# Altium PCB PCB1.PcbDoc
Units mil, origin at the board's own origin, x right, y up, seen from the top; angles counter-clockwise.
Board outline 3260 x 700 mil, 2 copper layers (Top Layer, Bottom Layer); 48 components, 75 nets, 234 pads, 72 vias.
Unrouted connection lines stored in the file: 3.
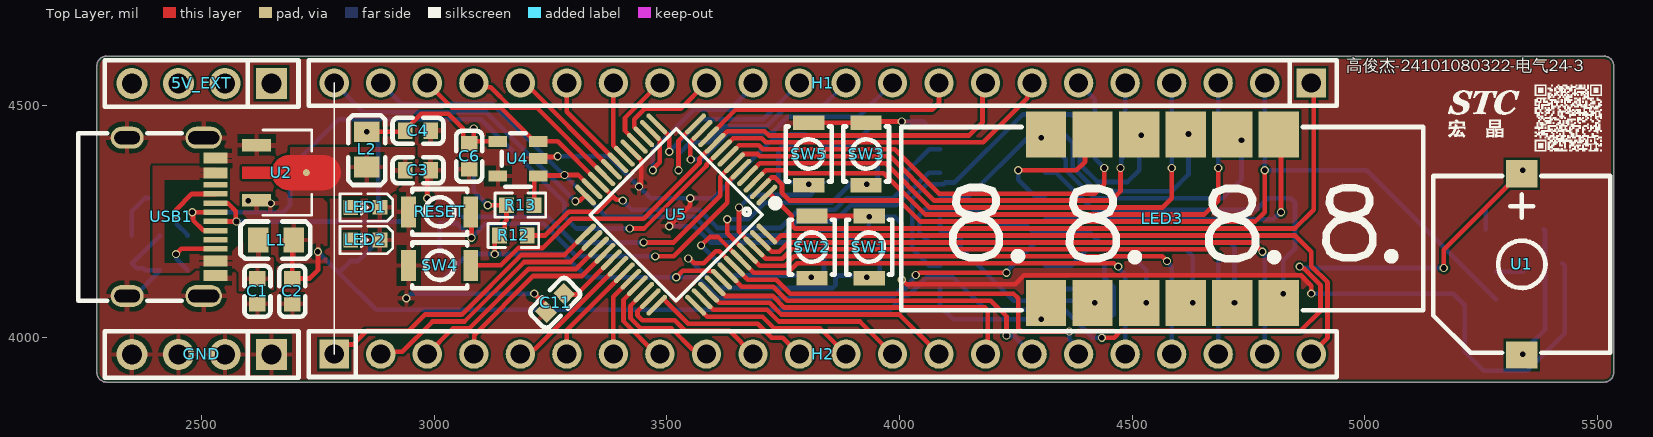
[diagram p0: Top Layer view]
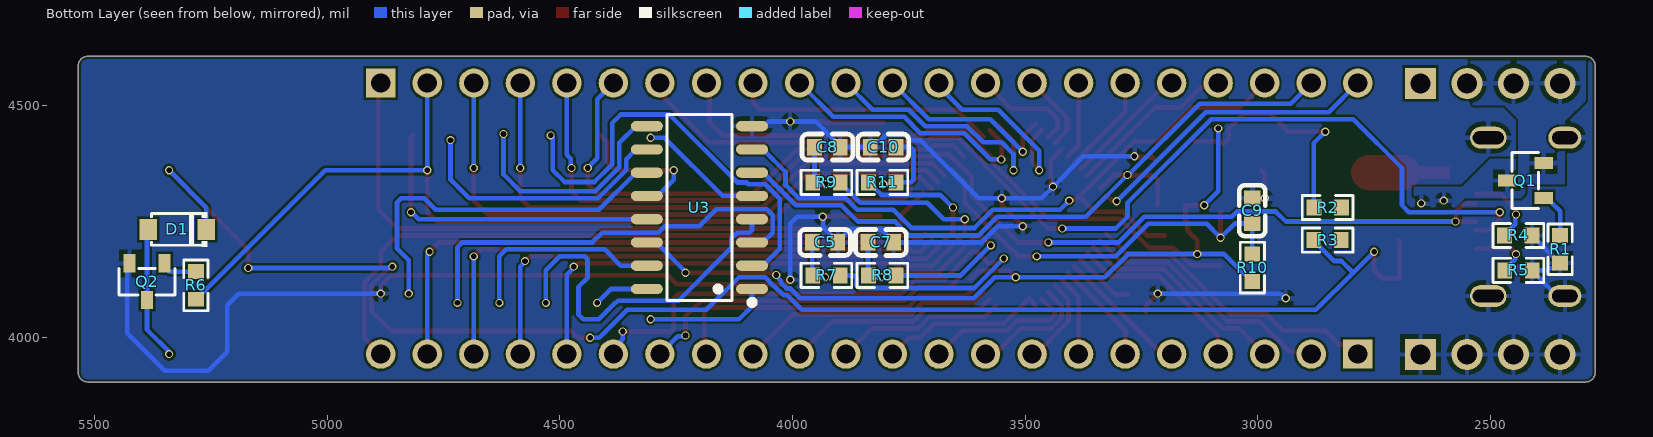
[diagram p1: Bottom Layer view, seen from below]

## Layer stack, top to bottom
Top Solder: solder mask 0.4, Solder Resist, Dk 3.5
Top Layer: signal copper 1.4
Dielectric 1: dielectric 12.6, FR-4, Dk 4.8
Bottom Layer: signal copper 1.4
Bottom Solder: solder mask 0.4, Solder Resist, Dk 3.5

## Board outline
2275,3925 2275,4585 cw(c2295,4585) 2295,4605 5515,4605 cw(c5515,4585) 5535,4585 5535,3925 cw(c5515,3925) 5515,3905 2295,3905 cw(c2295,3925)

## Design rules (kind name [scope] priority, off if disabled: settings)
Clearance [All] p1: gap=5 ignorepadtopadclearanceinfootprint=TRUE
ComponentClearance [All] p1: gap=10 collisioncheckmode=3 verticalgap=10 showdistances=FALSE donotcheckwithout3dbody=TRUE
PolygonConnect [All] p1: connectstyle=Relief reliefconductorwidth=10 reliefentries=4 polygonreliefangle="90 Angle" airgapwidth=10
RoutingVias [All] p1: holewidth=28 width=50 viastyle="Through Hole" minholewidth=28 minwidth=50 maxholewidth=28 maxwidth=50
SolderMaskExpansion [All] p1: expansion=4 istentingtop=FALSE
Width [All] p1: maxlimit=7452 minlimit=99999 preferedwidth=8 toplayer_minwidth=0 bottomlayer_minwidth=0 minimp=50.000000 maximp=50.000000 favimp=50.000000
29 further rules are at their usual default settings.

## Classes and differential pairs
component class Sheet2: C11 H1 H2 U5
component class Sheet1: 5V_EXT C1 C2 C3 C4 C5 C6 C7 C8 C9 C10 D1 GND L1 L2 LED1 LED2 LED3 Q1 Q2 R1 R2 R3 R4 R5 R6 R7 R8 R9 R10 R11 R12 R13 RESET SW1 SW2 SW3 SW4 SW5 U1 U2 U3 U4 USB1

## Components (designator, comment, footprint, x,y, rotation, side; value= is the part's Value field where it differs from the comment)
5V_EXT "" HDR-TH_4P-P2.54-V-F 2500,4546.89 r180 top
C1 "1uf/0603" C0603 2620,4100 r90 top
C2 "1uf/0603" C0603 2695,4100 r90 top
C3 "1uf/0603" C0603 2965,4360 r180 top
C4 "1uf/0603" C0603 2965,4445 r180 top
C5 "100nF/0603" C0603 3930,4205 r0 bottom
C6 "1uf/0603" C0603 3075,4390 r90 top
C7 "100nF/0603" C0603 3810,4205 r0 bottom
C8 "100nF/0603" C0603 3925,4410 r0 bottom
C9 "100nF/0603" C0603 3011.71,4273.19 r270 bottom
C10 "100nF/0603" C0603 3805,4410 r180 bottom
C11 "1uf/0603" C0603 3260,4075 r45 top
D1 "1N4148W-E" SOD-123_L2.8-W1.6-LS3.7-RD 5322.4,4232.93 r0 bottom
GND "" HDR-TH_4P-P2.54-V-F 2500,3964.21 r180 top
H1 "HC-PZ254-11.5L-1x22PZ" HDR-TH_22P-P2.54-V-M 3835,4547.68 r180 top
H2 "HC-PZ254-11.5L-1x22PZ" HDR-TH_22P-P2.54-V-M 3835,3965 r0 top
L1 "BLM21PG221SN1D" L0805 2660,4210 r0 top
L2 "BLM21PG221SN1D" L0805 2855,4405 r90 top
LED1 "" LED_0603 2850,4280 r180 top
LED2 "" LED_0603 2850,4210 r180 top
LED3 "XL-SA2401SRWC" LED-SEG-SMD_12P-L28.5-W10.0-P2.54 4565,4256.1 r0 top
Q1 "HL3401A" SOT-23-3_L2.9-W1.3-P1.90-LS2.4-BR 2424.93,4337.93 r180 bottom
Q2 "SS8050" SOT-23-3_L2.9-W1.3-P1.90-LS2.4-BR 5387.4,4120.63 r90 bottom
R1 "0603/5k1" R0603 2350,4190.34 r270 bottom
R2 "0603/5k1" R0603 2849.66,4280 r0 bottom
R3 "0603/5k1" R0603 2850,4210 r0 bottom
R4 "0603/5k1" R0603 2440,4220 r0 bottom
R5 "0603/5k1" R0603 2439.66,4145 r180 bottom
R6 "1K/0603" R0603 5282.4,4112.59 r90 bottom
R7 "0603/300R" R0603 3926.95,4134.08 r180 bottom
R8 "0603/300R" R0603 3806.95,4134.08 r180 bottom
R9 "0603/300R" R0603 3926.95,4334.08 r180 bottom
R10 "0603/5k1" R0603 3011.71,4150.75 r270 bottom
R11 "0603/300R" R0603 3806.95,4334.08 r0 bottom
R12 "0603/5k1" R0603 3170,4220 r0 top
R13 "0603/5k1" R0603 3185,4285 r0 top
RESET "B3U-1000P" KEY-SMD_B3U-1000PM 3011.71,4270.75 r180 top
SW1 "B3U-1000P" KEY-SMD_B3U-1000PM 3935,4195 r270 top
SW2 "B3U-1000P" KEY-SMD_B3U-1000PM 3811.67,4195 r270 top
SW3 "B3U-1000P" KEY-SMD_B3U-1000PM 3928.33,4395 r270 top
SW4 "P32->GND" KEY-SMD_B3U-1000PM 3011.71,4155.75 r180 top
SW5 "B3U-1000P" KEY-SMD_B3U-1000PM 3805,4395 r270 top
U1 "2.7kHz" BUZ-SMD_L9.7-W9.7 5337.4,4157.93 r0 top
U2 "HR1117V-3.3" SOT-89-3_L4.5-W2.4-P1.50-LS4.0-BR 2671.6,4354.99 r180 top
U3 "CH455G" SOP-16_L10.0-W3.9-P1.27-LS6.0-BL 4200,4280 r90 bottom
U4 "24C16S(XBLW)" SOT-23-5_L2.9-W1.6-P0.95-LS2.8-BL 3180,4385 r90 top
U5 "AI8051U-34K64-LQFP48" LQFP-48_L7.0-W7.0-P0.50-LS9.0-BL 3520,4265 r135 top
USB1 "" USB_TYPE-C-16P 2435,4265 r270 top

## Footprints (in the part's own frame and the unit in brackets; to place one, negate y for a bottom-side part, rotate by r counter-clockwise, add the part's x,y. Pads: shape width x height; smd on the part's side, far side on the other; paste and mask are expansions set on the pad)
BUZ-SMD_L9.7-W9.7 [mm]
  rect 1.7x1.5 smd paste+0.051: 1(0,4.95) 2(0,-4.95)
  silkscreen extent -4.83,-4.83 4.83,4.83
C0603 [mm]
  rect 0.8x0.9 smd paste+0.051: 1(-0.7,0) 2(0.7,0)
  silkscreen extent -1.39,-0.71 1.39,0.71
HDR-TH_4P-P2.54-V-F [mm]
  rect 1.7x1.7 hole 1.1 paste-2539.97: 1(-3.81,0)
  round 1.7 hole 1.1 paste-2539.97: 2(-1.27,0) 3(1.27,0) 4(3.81,0)
  silkscreen extent -5.29,-1.27 5.29,1.27
HDR-TH_22P-P2.54-V-M [mm]
  rect 1.6x1.6 hole 1.05 paste-2539.97: 1(-26.67,0)
  round 1.6 hole 1.05 paste-2539.97: 2(-24.13,0) 3(-21.59,0) 4(-19.05,0) 5(-16.51,0) 6(-13.97,0) 7(-11.43,0) 8(-8.89,0) 9(-6.35,0) 10(-3.81,0) 11(-1.27,0) 12(1.27,0) 13(3.81,0) 14(6.35,0) 15(8.89,0) 16(11.43,0) 17(13.97,0) 18(16.51,0) 19(19.05,0) 20(21.59,0) 21(24.13,0) 22(26.67,0)
  silkscreen extent -28.06,-1.25 28.06,1.25
KEY-SMD_B3U-1000PM [mm]
  rect 0.8x1.7 smd paste+0.051: 1(-1.7,0) 2(1.7,0)
  silkscreen extent -1.5,-1.25 1.5,1.25
L0805 [mil]
  rect 44.59x54.21 smd paste-3937.01 mask+2: 1(-38.04,0) 2(38.04,0)
  silkscreen extent -77,-40 73,40
LED-SEG-SMD_12P-L28.5-W10.0-P2.54 [mm]
  rect 2.2x2.5 smd paste+0 mask+0.05: 1(-6.35,-4.6) 2(-3.81,-4.6) 3(-1.27,-4.6) 4(1.27,-4.6) 5(3.81,-4.6) 6(6.35,-4.6) 7(6.35,4.6) 8(3.81,4.6) 9(1.27,4.6) 10(-1.27,4.6) 11(-3.81,4.6) 12(-6.35,4.6)
  silkscreen extent -14.25,-5 14.25,5
LED_0603 [mil]
  rect 31.5x31.5 smd paste+0 mask+2: 1(-33.5,-0.4) 2(29.5,-0.2)
  silkscreen extent -61,-30 53,30
LQFP-48_L7.0-W7.0-P0.50-LS9.0-BL [mm]
  oval 0.27x1.5 smd paste+0 mask+0.05: 1(-2.75,-4.25) 2(-2.25,-4.25) 3(-1.75,-4.25) 4(-1.25,-4.25) 5(-0.75,-4.25) 6(-0.25,-4.25) 7(0.25,-4.25) 8(0.75,-4.25) 9(1.25,-4.25) 10(1.75,-4.25) 11(2.25,-4.25) 12(2.75,-4.25) 25(2.75,4.25) 26(2.25,4.25) 27(1.75,4.25) 28(1.25,4.25) 29(0.75,4.25) 30(0.25,4.25) 31(-0.25,4.25) 32(-0.75,4.25) 33(-1.25,4.25) 34(-1.75,4.25) 35(-2.25,4.25) 36(-2.75,4.25)
  oval 1.5x0.27 smd paste+0 mask+0.05: 13(4.25,-2.75) 14(4.25,-2.25) 15(4.25,-1.75) 16(4.25,-1.25) 17(4.25,-0.75) 18(4.25,-0.25) 19(4.25,0.25) 20(4.25,0.75) 21(4.25,1.25) 22(4.25,1.75) 23(4.25,2.25) 24(4.25,2.75) 37(-4.25,2.75) 38(-4.25,2.25) 39(-4.25,1.75) 40(-4.25,1.25) 41(-4.25,0.75) 42(-4.25,0.25) 43(-4.25,-0.25) 44(-4.25,-0.75) 45(-4.25,-1.25) 46(-4.25,-1.75) 47(-4.25,-2.25) 48(-4.25,-2.75)
  silkscreen extent -3.59,-4.46 3.3,3.34
R0603 [mil]
  rect 31.75x34.02 smd paste-3937.01 mask+2: 1(-29.66,0) 2(29.66,0)
  silkscreen extent -55,-26 55,26
SOD-123_L2.8-W1.6-LS3.7-RD [mm]
  rect 0.95x1.15 smd paste+0.051: 1(-1.592,0) 2(1.592,0)
  silkscreen extent -1.63,-0.94 1.41,0.94
SOP-16_L10.0-W3.9-P1.27-LS6.0-BL [mm]
  oval 0.56x1.745 smd paste+0.051: 1(-4.445,-2.872) 2(-3.175,-2.872) 3(-1.905,-2.872) 4(-0.635,-2.872) 5(0.635,-2.872) 6(1.905,-2.872) 7(3.175,-2.872) 8(4.445,-2.872) 9(4.445,2.872) 10(3.175,2.872) 11(1.905,2.872) 12(0.635,2.872) 13(-0.635,2.872) 14(-1.905,2.872) 15(-3.175,2.872) 16(-4.445,2.872)
  silkscreen extent -5.33,-3.02 5.08,1.77
SOT-23-3_L2.9-W1.3-P1.90-LS2.4-BR [mm]
  rect 1x0.65 smd paste+0.051: 1(1,-0.95) 2(1,0.95) 3(-1,0)
  silkscreen extent -0.73,-1.53 0.73,1.53
SOT-23-5_L2.9-W1.6-P0.95-LS2.8-BL [mm]
  rect 0.6x1 smd paste+0 mask+0.05: 1(-0.95,-1.1) 2(0,-1.1) 3(0.95,-1.1) 4(0.95,1.1) 5(-0.95,1.1)
  silkscreen extent -1.52,-0.7 1.4,0.89
SOT-89-3_L4.5-W2.4-P1.50-LS4.0-BR [mm]
  rect 1.575x0.672 smd paste+0.051: 1(1.356,-1.5) 3(1.356,1.5)
  round 0.38 smd: 2(-1.356,0)
  Top Layer region: -2.283,0.95 -0.429,0.95 -0.384,0.949 -0.34,0.946 -0.296,0.941 -0.252,0.933 -0.208,0.924 -0.165,0.913 -0.123,0.899 -0.081,0.884 -0.04,0.867 0,0.847 0.04,0.826 0.078,0.804 0.115,0.779 0.151,0.753 0.185,0.725 0.219,0.695 0.251,0.664 0.281,0.631 0.31,0.597 0.337,0.562 0.362,0.525 0.386,0.488 0.408,0.449 0.428,0.409 0.447,0.33 2.144,0.33 2.144,-0.33 0.447,-0.33 0.428,-0.409 0.408,-0.449 0.386,-0.488 0.362,-0.525 0.337,-0.562 0.31,-0.597 0.281,-0.631 0.251,-0.664 0.219,-0.695 0.185,-0.725 0.151,-0.753 0.115,-0.779 0.078,-0.804 0.04,-0.826 0,-0.847 -0.04,-0.867 -0.081,-0.884 -0.123,-0.899 -0.165,-0.913 -0.208,-0.924 -0.252,-0.933 -0.296,-0.941 -0.34,-0.946 -0.384,-0.949 -0.429,-0.95 -2.283,-0.95 -2.328,-0.949 -2.372,-0.946 -2.416,-0.941 -2.46,-0.933 -2.504,-0.924 -2.547,-0.913 -2.589,-0.899 -2.631,-0.884 -2.672,-0.867 -2.712,-0.847 -2.752,-0.826 -2.79,-0.804 -2.827,-0.779 -2.863,-0.753 -2.898,-0.725 -2.931,-0.695 -2.963,-0.664 -2.993,-0.631 -3.022,-0.597 -3.049,-0.562 -3.075,-0.525 -3.098,-0.488 -3.12,-0.449 -3.14,-0.409 -3.159,-0.369 -3.175,-0.327 -3.189,-0.285 -3.202,-0.242 -3.212,-0.199 -3.22,-0.155 -3.227,-0.111 -3.231,-0.067 -3.233,-0.022 -3.233,0.022 -3.231,0.067 -3.227,0.111 -3.22,0.155 -3.212,0.199 -3.202,0.242 -3.189,0.285 -3.175,0.327 -3.159,0.369 -3.14,0.409 -3.12,0.449 -3.098,0.488 -3.075,0.525 -3.049,0.562 -3.022,0.597 -2.993,0.631 -2.963,0.664 -2.931,0.695 -2.898,0.725 -2.863,0.753 -2.827,0.779 -2.79,0.804 -2.752,0.826 -2.712,0.847 -2.672,0.867 -2.631,0.884 -2.589,0.899 -2.547,0.913 -2.504,0.924 -2.46,0.933 -2.416,0.941 -2.372,0.946 -2.328,0.949
  silkscreen extent -1.65,-2.33 1,2.33
USB_TYPE-C-16P [mm]
  oval 1.2x2 hole 0.7 slot 1.7 at 90 deg paste-2539.97 mask+0.051: 1(-4.193,1.765) 2(4.447,1.765)
  oval 1.2x1.8 hole 0.7 slot 1.4 at 90 deg paste-2539.97 mask+0.051: 3(-4.193,-2.415) 4(4.447,-2.415)
  rect 0.3x1.3 smd paste-100 mask+0.05: A1(-3.223,2.415) A4(-2.423,2.415) A5(-1.123,2.415) A6(-0.123,2.415) A7(0.377,2.415) A8(1.377,2.415) A9(2.677,2.415) A12(3.477,2.415) B1(3.177,2.415) B4(2.377,2.415) B5(1.877,2.415) B6(0.877,2.415) B7(-0.623,2.415) B8(-1.623,2.415) B9(-2.123,2.415) B12(-2.923,2.415)
  silkscreen extent -4.45,-5.08 4.7,0.57

## Part data
5V_EXT GND: library part HDR-F_2.54_1x4P, AddInBom=yes, ConvertToPcb=yes, Device=HDR-F_2.54_1x4P, FootprintName=HDR-TH_4P-P2.54-V-F, ModelId=d187812051054f85879fcaa51a310d8e聨0819f05c4eef4c71ace90d822a990e87, ModelName=HDR-TH_4P-P2.54-V-F, ModelTransform=419.6842,98.464,0,0,0,0,0,0,-118.11, Supplier Footprint=插件, SupplierPart=C2718488, Symbol=2.54-1*4P母
C1 C2 C3 C4 C5 C6 C7 C8 C9 C10 C11: library part CAP_0603, 3D Model=ac125912035d415993ca9572d50418b1聨0819f05c4eef4c71ace90d822a990e87, 3D Model Transform=62.992,31.496,0,0,0,0,0,0,0, AddInBom=yes, ConvertToPcb=yes, Device=CAP_0603, FootprintName=C0603, ModelName=C0603_L1.6-W0.8-H0.8, Supplier Footprint=0603, Symbol=Capacitance
D1: "二极管配置:-;正向压降(Vf):-;直流反向耐压(Vr):-;", Forward Voltage (Vf@If)=-, JLCPCB Part Class=扩展库, LCSC Part Name=开关二极管, Manufacturer=MDD(辰达半导体), 3D Model=73858e86c18848f5a81710cfe7352ee5, 3D Model Transform=145.669,70.3249,0,0,0,0,0,0,0, AddInBom=yes, ConvertToPcb=yes, Datasheet=https://atta.szlcsc.com/upload/public/pdf/source/20240830/DACFAB1CEFECD76C0C0B0085B83E27DC.pdf, Device=1N4148W-E, Diode Configuration=-, FootprintName=SOD-123_L2.8-W1.6-LS3.7-RD, Manufacturer Part=1N4148W-E, ModelName=SOD-123_L2.8-W1.6-LS3.7-RD, Reverse Voltage (Vr)=-, Supplier=LCSC, Supplier Footprint=SOD-123, Supplier Part=C41371420, Symbol=1n4148w-e
H1 H2: "插针结构:1x22P;间距:2.54mm;行距:-;圆针/方针:方针;安装方式:直插;排数:单排;总PIN位数:22P;额定电流:3A;额定电压:-;配合针长度:6mm;塑高:2.5mm;端接针长度:3mm;触头材质:黄铜;触头镀层:金;工作温度:-40℃~+105℃;颜色:黑色;", Color=黑色, Current Rating=3A, JLCPCB Part Class="Extended Part", LCSC Part Name="1x22P 间距:2.54mm 方针 直插", Manufacturer=HC(虹成电子), Operating Temperature=-40℃~+105℃, Voltage Rating (Max)=-, AddInBom=yes, Circluar Pins/Square Pins=方针, Contact Material=黄铜, Contact Plating=金, ConvertToPcb=yes, Datasheet=https://item.szlcsc.com/datasheet/HC-PZ254-11.5L-1x22PZ/43143790.html, Device=HC-PZ254-11.5L-1x22PZ, FootprintName=HDR-TH_22P-P2.54-V-M, Insulation Height=2.5mm, Length of End Connection Pin=3mm, Length of Mating Pin=6mm, ManufacturerPart=HC-PZ254-11.5L-1x22PZ, ModelId=875f4c094945453e8148e92095c9b8a7聨0819f05c4eef4c71ace90d822a990e87, ModelName=HDR-TH_22P-P2.54-M-LI-1X22P, ModelTransform=2199.99552,98.425,0,0,0,0,0,0,-118.11, Mounting Type=直插, Number of Pins=22P, Number of Rows=单排, Pin Structure=1x22P, Pitch=2.54mm, Row Spacing=-, Supplier=LCSC, Supplier Footprint=插件,P=2.54mm, SupplierPart=C41375941, Symbol=HC-PZ254-11.5L-1X22PZ
L1 L2: "阻抗@频率:220Ω@100MHz;误差:±25%;直流电阻(DCR):45mΩ;", Current Rating=2A, DC Resistance(DCR)=45mΩ, Impedance @ Frequency=220Ω@100MHz, JLCPCB Part Class="Extended Part", LCSC Part Name="单路 0805磁珠 阻抗220Ω@100MHz", Manufacturer=muRata(村田), Operating Temperature=-55℃~+125℃, Tolerance=±25%, AddInBom=yes, ConvertToPcb=yes, Datasheet=https://item.szlcsc.com/datasheet/BLM21PG221SN1D/87016.html, Device=BLM21PG221SN1D, FootprintName=L0805, ManufacturerPart=BLM21PG221SN1D, ModelId=37a81e68749a4138bd2dfa6897b24b85聨0819f05c4eef4c71ace90d822a990e87, ModelName=R0805_L2.0-W1.3-H0.6, ModelTransform=78.74,51.181,0,0,0,0,0,0.001,0, Number of Circuits=1, Supplier=LCSC, Supplier Footprint=0805, SupplierPart=C85840, Symbol=BLM21PG221SN1D
LED1 LED2: library part LED_0603-G, 3D Model=8b5fcaf0229049f8a37a9c352bb0ca0a聨0819f05c4eef4c71ace90d822a990e87, 3D Model Transform=63.1,31.6,23.7,0,0,0,0,0,0, Add into BOM=yes, Convert to PCB=yes, Device=LED_0603-G, FootprintName=LED_0603, ModelName=LED-0603_G, Supplier Footprint=0603, Symbol=LED_G_OLD
LED3: "数码管位数:4位;字符尺寸(英寸):0.2;LED极性:共阴;发光颜色:红色;耗散功率(Pd):36mW;", Forward Voltage Drop=1.8V, Illumination Color=红色, JLCPCB Part Class="Extended Part", LCSC Part Name=0.2英寸红色四位共阴数码管, Manufacturer=XINGLIGHT(成兴光), Operating Temperature=-30℃~+70℃, Pd - Power Dissipation=36mW, AddInBom=yes, ConvertToPcb=yes, Datasheet=https://item.szlcsc.com/datasheet/XL-SA2401SRWC/52210392.html, Device=XL-SA2401SRWC, Digit/Alpha Size(inch)=0.2, Display Type=7段, FootprintName=LED-SEG-SMD_12P-L28.5-W10.0-P2.54, Height=-, LED Polarity=共阴, Length=-, Light Intensity=100mcd, ManufacturerPart=XL-SA2401SRWC, ModelId=84030f14c7a848788791f3033a3ddaf3聨0819f05c4eef4c71ace90d822a990e87, ModelName=LED-SEG-SMD_12P-L28.5-W10.0-P2.54, ModelTransform=1122.045,393.7,0,0,0,0,0,0,0, Number of Characters=4位, Supplier=LCSC, Supplier Footprint=SMD, SupplierPart=C49652871, Symbol=XL-SA2401SRWC, Width=-
Q1: "数量:1个P沟道;漏源电压(Vdss):30V;连续漏极电流(Id):4.2A;导通电阻(RDS(on)):50mΩ@10V;耗散功率(Pd):350mW;阈值电压(Vgs(th)):900mV@250uA;", Current - Continuous Drain(Id)=4.2A, Drain to Source Voltage=30V, Gate Threshold Voltage (Vgs(th))=900mV@250uA, Input Capacitance(Ciss)=954pF, JLCPCB Part Class="Extended Part", LCSC Part Name="1个P沟道 耐压:30V 电流:4.2A", Manufacturer=R+O(宏嘉诚), Operating Temperature=-55℃~+150℃, Output Capacitance(Coss)=115pF, Pd - Power Dissipation=350mW, Reverse Transfer Capacitance (Crss@Vds)=77pF, AddInBom=yes, ConvertToPcb=yes, Datasheet=https://item.szlcsc.com/datasheet/HL3401A/8397171.html, Device=HL3401A, FootprintName=SOT-23-3_L2.9-W1.3-P1.90-LS2.4-BR, Gate Charge(Qg)=22nC@10V, ManufacturerPart=HL3401A, ModelId=c62791f0466c4ae2a892c056b845b0ca聨0819f05c4eef4c71ace90d822a990e87, ModelName=SOT-23-3P_L2.9-W1.3-H1.0-LS2.4-P0.95, ModelTransform=98.425,114.173,0,180,0,0,0.0005,-0.0005,0, Number=1个P沟道, RDS(on)=50mΩ@10V, Supplier=LCSC, Supplier Footprint=SOT-23, SupplierPart=C7420349, Symbol=HL3401A, Type=P沟道
Q2: library part SS8050_C2150, "晶体管类型:NPN;集电极电流(Ic):1.5A;集射极击穿电压(Vceo):25V;功率(Pd):300mW;直流电流增益(hFE@Ic,Vce):200@100mA,1V;", Collector Current (Ic)=1.5A, Collector Cut-Off Current (Icbo)=100nA, Collector-Emitter Breakdown Voltage (Vceo)=25V, Collector-Emitter Saturation Voltage (VCE(sat)@Ic,Ib)=500mV@800mA,80mA, DC Current Gain (hFE@Ic,Vce)=200@100mA,1V, LCSC Part Name="SS8050(RANGE:200-350) hfe=200~350", Manufacturer=CJ(江苏长电/长晶), Operating Temperature=-, Power Dissipation (Pd)=300mW, Transition Frequency (fT)=100MHz, 3D Model=c62791f0466c4ae2a892c056b845b0ca, 3D Model Transform=98.425,114.173,0,180,0,0,0.0005,-0.0005,0, AddInBom=yes, ConvertToPcb=yes, Datasheet=https://atta.szlcsc.com/upload/public/pdf/source/20230322/AEE86F4B043774EFF80CAEA14A37D9E9.pdf, Device=SS8050_C2150, FootprintName=SOT-23-3_L2.9-W1.3-P1.90-LS2.4-BR, Manufacturer Part=SS8050, ModelName=SOT-23-3P_L2.9-W1.3-H1.0-LS2.4-P0.95, Supplier=LCSC, Supplier Footprint=SOT-23, Supplier Part=C2150, Symbol=SS8050_C2150, Transistor Type=NPN
R1 R2 R3 R4 R5 R6 R7 R8 R9 R10 R11 R12 R13: library part Res_0603, AddInBom=yes, ConvertToPcb=yes, Device=Res_0603, FootprintName=R0603, ModelId=fc143cca1e79419f9cd78b61e9279f08聨0819f05c4eef4c71ace90d822a990e87, ModelName=R0603, ModelTransform=31.8897,63.7794,0,90,0,0,0,0,0, Supplier Footprint=0603, Symbol=电阻
RESET SW1 SW2 SW3 SW5: "电路结构:单刀单掷;按钮形状:圆形按钮;作用力:1.53N;安装方式:立贴;开关长度:3mm;开关宽度:2.5mm;开关高度:1.6mm;触点电流:50mA;额定电压:12V;带灯:-;工作寿命:-;", Contact Current=50mA, JLCPCB Part Class="Extended Part", LCSC Part Name="3*2.5*1.6mm 立贴 轻触开关", Manufacturer=OMRON(欧姆龙), Operating Force=1.53N, Operating Temperature=-25℃~+70℃, Voltage Rating=12V, Actuator Style=圆形按钮, AddInBom=yes, Circuit=单刀单掷, ConvertToPcb=yes, Datasheet=https://item.szlcsc.com/datasheet/B3U-1000P/231216.html, Device=B3U-1000P, FootprintName=KEY-SMD_B3U-1000PM, Length=3mm, Life=-, ManufacturerPart=B3U-1000P, ModelId=4a122f942e8c428cab657e97b0b9ae70聨0819f05c4eef4c71ace90d822a990e87, ModelName=KEY-SMD_2P-L3.0-W2.5-H1.6-LS4.0, ModelTransform=157.48,98.425,0,0,0,0,0,0,0, Mounting Type=立贴, Supplier=LCSC, Supplier Footprint=SMD,2.5x3mm, SupplierPart=C231329, Switch Height=1.6mm, Symbol=B3U-1000P, Termination Style=SMD接片, Width=2.5mm, With Lamp=-
SW4: library part B3U-1000P, "电路结构:单刀单掷;按钮形状:圆形按钮;作用力:1.53N;安装方式:立贴;开关长度:3mm;开关宽度:2.5mm;开关高度:1.6mm;触点电流:50mA;额定电压:12V;带灯:-;工作寿命:-;", Contact Current=50mA, JLCPCB Part Class="Extended Part", LCSC Part Name="3*2.5*1.6mm 立贴 轻触开关", Manufacturer=OMRON(欧姆龙), Operating Force=1.53N, Operating Temperature=-25℃~+70℃, Voltage Rating=12V, Actuator Style=圆形按钮, AddInBom=yes, Circuit=单刀单掷, ConvertToPcb=yes, Datasheet=https://item.szlcsc.com/datasheet/B3U-1000P/231216.html, Device=B3U-1000P, FootprintName=KEY-SMD_B3U-1000PM, Length=3mm, Life=-, ManufacturerPart=B3U-1000P, ModelId=4a122f942e8c428cab657e97b0b9ae70聨0819f05c4eef4c71ace90d822a990e87, ModelName=KEY-SMD_2P-L3.0-W2.5-H1.6-LS4.0, ModelTransform=157.48,98.425,0,0,0,0,0,0,0, Mounting Type=立贴, Supplier=LCSC, Supplier Footprint=SMD,2.5x3mm, SupplierPart=C231329, Switch Height=1.6mm, Symbol=B3U-1000P, Termination Style=SMD接片, Width=2.5mm, With Lamp=-
U1: library part CMI-9705-0580-SMT-TR, "驱动方式:有源(内含驱动线路);构造类型:电磁式;额定电压:5V;频率:2.7kHz;声压(SPL):80dB;", Continuous Operating Time=-, Current Consumption=30mA, JLCPCB Part Class="Extended Part", LCSC Part Name=磁性蜂鸣器指示器，表面贴装，内部驱动, Manufacturer=CUI, Voltage - Supply=3V~8V, Voltage Rating=5V, AddInBom=yes, ConvertToPcb=yes, Datasheet=https://item.szlcsc.com/datasheet/CMI-9705-0580-SMT-TR/23802189.html, Device=CMI-9705-0580-SMT-TR, Diameter(φD)=-, Driver Circuitry=有源(内含驱动线路), FootprintName=BUZ-SMD_L9.7-W9.7, Height=-, Lead Pitch=-, Length=-, ManufacturerPart=CMI-9705-0580-SMT-TR, ModelId=4d30b5b9f6214c52b026a489d6e841ad聨0819f05c4eef4c71ace90d822a990e87, ModelName=BUZ-SMD_L9.7-W9.7, ModelTransform=382.283,397.637,0,0,0,0,0,-0.001,0, Mounting Type=-, Operating Temperature=-, Sound Pressure Level(SPL)=80dB, Supplier=LCSC, Supplier Footprint=SMD,9.7x9.7mm, SupplierPart=C22359716, Symbol=CMI-9705-0580-SMT-TR, Technology=电磁式, Width=-
U2: "输出极性:正极;工作电压:15V;输出电压:3.3V;输出电流:1A;电源纹波抑制比(PSRR):-;输出类型:固定;", JLCPCB Part Class="Extended Part", LCSC Part Name=低压差线性稳压器，分固定电压输出和可调电压输出版本, Manufacturer=R+O(宏嘉诚), Operating Temperature=-40℃~+85℃, Output Current=1A, Output Voltage=3.3V, Power Supply Rejection Ratio (PSRR)=-, standby current=2mA, Voltage - Supply=15V, Voltage Dropout=1.1V@(1A), AddInBom=yes, ConvertToPcb=yes, Datasheet=https://item.szlcsc.com/datasheet/HR1117V-3.3/57930308.html, Device=HR1117V-3.3, Features=热关断, FootprintName=SOT-89-3_L4.5-W2.4-P1.50-LS4.0-BR, ManufacturerPart=HR1117V-3.3, ModelId=dde435042bae4b9691e74da94cf9d9f3聨0819f05c4eef4c71ace90d822a990e87, ModelName=SOT-89-3_L4.5-W2.4-P1.50-LS4.0-BR, ModelTransform=177.165,161.417,0,90,0,0,-2.323,0,0, Noise=0.003%Vout, Number of Outputs=1, Output Configuration=正极, Output Type=固定, Supplier=LCSC, Supplier Footprint=SOT-89, SupplierPart=C54560864, Symbol=HR1117V-3.3
U3: "接口类型:I2C;工作电压:2.7V~5V;时钟频率(fc):4MHz;位驱动电流:160mA;段驱动电流:25mA;", Clock Frequency=4MHz, Digit Drive Current=160mA, JLCPCB Part Class="Extended Part", LCSC Part Name=数码管驱动及键盘控制芯片, Manufacturer=WCH(南京沁恒), Operating Temperature=-40℃~+85℃, Pd - Power Dissipation=-, Quiescent Current=50uA, Segment Drive Current=25mA, Voltage - Supply=2.7V~5V, AddInBom=yes, Configuration=7段x4位；8段x4位, ConvertToPcb=yes, Datasheet=https://item.szlcsc.com/datasheet/CH455G/91000.html, Device=CH455G, Features=键盘扫描；共阴极；辉光可调, FootprintName=SOP-16_L10.0-W3.9-P1.27-LS6.0-BL, Interface=I2C, ManufacturerPart=CH455G, ModelId=3361a6792abf4a8f8fbca4f1924a67ee聨0819f05c4eef4c71ace90d822a990e87, ModelName=SOP-16_L9.9-W3.9-H1.5-LS6.0-P1.27, ModelTransform=240.39054,393.7,0,90,0,0,0,0,0, Supplier=LCSC, Supplier Footprint=SOP-16, SupplierPart=C89818, Symbol=CH455G
U4: "接口类型:I2C;存储容量:16Kbit;时钟频率(fc):1MHz;", Clock Frequency=1MHz, JLCPCB Part Class="Extended Part", LCSC Part Name="16Kbit 串行EEPROM", Manufacturer=XBLW(芯伯乐), Operating Temperature=-40℃~+85℃, Voltage - Supply=1.8V~5.5V, AddInBom=yes, ConvertToPcb=yes, Data Retention - TDR (Year)=100年, Datasheet=https://item.szlcsc.com/datasheet/24C16S(XBLW)/43210132.html, Device=24C16S(XBLW), Features=内置上电复位(POR)；硬件写保护功能；噪声抑制功能, FootprintName=SOT-23-5_L2.9-W1.6-P0.95-LS2.8-BL, Interface=I2C, ManufacturerPart=24C16S(XBLW), Memory Size=16Kbit, ModelId=018c57e721114987ae90467fe9f1d259聨0819f05c4eef4c71ace90d822a990e87, ModelName=SOT-23-5_L2.9-W1.6-P0.95-LS2.8-BL, ModelTransform=114.96,110.236,0,0,0,0,0,0,0, Supplier=LCSC, Supplier Footprint=SOT-23-5, SupplierPart=C41408503, Symbol=24C16S(XBLW), Write Cycle Endurance=100万次, Write Cycle Time(Tw)=5ms
U5: "硬件浮点/硬件三角函数 跑100MHz, 32位8051-CPU 跑 44MHz，PWM 有硬件移相功能，DMA支持外设到外设，DMA支持PWM", JLCPCB Part Class="Extended Part", LCSC Part Name=单片机(MCU/MPU/SOC), Manufacturer=STC, AddInBom=yes, ConvertToPcb=yes, Datasheet=https://item.szlcsc.com/datasheet/AI8051U-34K64-LQFP48/44315053.html, Device=AI8051U-34K64-LQFP48, FootprintName=LQFP-48_L7.0-W7.0-P0.50-LS9.0-BL, ManufacturerPart=AI8051U-34K64-LQFP48, ModelId=093be70396ff421eb2cdb946d5311efc聨0819f05c4eef4c71ace90d822a990e87, ModelName=LQFP-48_L7.0-W7.0-H1.4-LS9.0-P0.50, ModelTransform=354.331,354.331,0,0,0,0,0,0,0, Supplier=LCSC, Supplier Footprint=LQFP-48(7x7), SupplierPart=C42388168, Symbol=AI8051U-34K64-LQFP48
USB1: library part USB_TYPE-C-16P, AddInBom=yes, ConvertToPcb=yes, Device=USB_TYPE-C-16P, FootprintName=USB_TYPE-C-16P, ModelId=35058e297fd54ee2afd2de30c3ce7155聨0819f05c4eef4c71ace90d822a990e87, ModelName=USB-C_SMD-TYPE-C-31-M-12, ModelTransform=360,318.121,0,180,0,0,0,-41.02,-39.37, Supplier Footprint=SMD, Symbol=USB_TYPE-C-16P

## Via types
v1: diameter 17.72, hole 12.01, Top Layer to Bottom Layer, 72 vias

## Nets (pads, with @x,y where several pads share a name; then routed paths per layer and width w, separated by ;. In a path a pad name is that pad's centre, name@x,y a point inside that pad or via, vN(x,y) a via of type N, cw(c..) or ccw(c..) an arc to the next point about the centre after c; other vN are vias at no path point)
+3V3: C3.2 L2.1 U2.2
+5V: C2.2 D1.1 L1.2 Q1.3 R3.2 U1.1 U2.3 | length 3487.2
  Top Layer w10: L1.2 2695,4206.96 C2.2 2732.56,4127.56 2750,4145 v1(2750,4185) v1@2750,4190 ; v1(4435,4000) 4461.32,4000 4475.89,4014.58 4861.24,4014.58 4905,4058.34 4905,4112.88 4868.66,4149.22 4865.95,4149.22 4862.09,4153.07 v1(4860,4153.07) ; v1(5170,4150) 5170,4189.35 5340,4359.35 v1(5340,4360)
  Bottom Layer w10: v1(2750,4185) 2795,4140 ; R3.2 2879.66,4208.87 2835.79,4165 2820,4165 2795,4140 ; v1(4435,4000) 4415,4000 4355,4060 4185,4060 4115,4130 4058.85,4130 4039.83,4110.98 4038.86,4110.98 4019.02,4091.14 4011.14,4091.14 3980,4060 2875,4060 2795,4140 ; v1(4860,4153.07) 4862.09,4153.07 4865.16,4150 v1(5170,4150) ; D1.1 5259.71,4279.71 v1(5340,4360)
  other v1: 2648.33,4288.86 2600,4295
+5V_EXT: 5V_EXT.1 5V_EXT.2 5V_EXT.3 5V_EXT.4 Q1.2
D+: H1.7 U5.8 USB1.A6 USB1.B6 | length 2326.7
  Top Layer w10: v1(2480,4270) v1@2480.08,4269.92 ; USB1.B6 2529.17,4231.38 2503.23,4231.38 2481.48,4253.13 2481.48,4268.52 v1@2480.08,4269.92 ; USB1.A6 2530,4269.92 v1@2480.08,4269.92 ; v1(3420,4235) 3450.77,4235 3585.04,4369.27 3585.04,4371.8 U5.8 3617.6,4404.19 3642.23,4428.82 3703.61,4428.82 3712.43,4420 4180,4420 4274.86,4514.86 4274.86,4537.54 H1.7
  Bottom Layer w10: v1(2480,4270) 2675,4270 2690,4285 2690,4365 2795,4470 3100,4470 3280,4290 3280,4260 3305,4235 v1(3420,4235)
D-: H1.5 U5.6 USB1.A7 USB1.B7 | length 2443.7
  Top Layer w10: USB1.A7 2530.16,4250.08 v1@2574.92,4250.08 ; USB1.B7 2530.99,4288.62 2556.93,4288.62 2573.52,4272.03 2573.52,4251.48 v1@2574.92,4250.08 ; v1(2575,4250) v1@2574.92,4250.08 ; v1(3450,4205) 3515,4205 3615,4305 3615,4346.09 U5.6 ; U5.6@3645.44,4376.36 3664.09,4395 3695,4395 3700,4390 3980,4390 4075,4295 4455,4295 4475,4315 v1(4475,4365)
  Bottom Layer w10: v1(2575,4250) 2940,4250 2961.37,4271.37 3044.84,4271.37 3056.21,4260 3243.79,4260 3298.79,4205 v1(3450,4205) ; v1(4475,4365) 4476.48,4366.48 4476.48,4385.34 4485,4393.86 H1.5
DIG1: LED3.12 U3.5 | length 269.9
  Bottom Layer w10: U3.5 4150.4,4305 4275.4,4430 v1(4305,4430)
DIG2: LED3.9 U3.9 | length 498.4
  Bottom Layer w10: U3.9 4336.42,4455 4372.44,4418.98 4372.44,4366.86 4424.3,4315 4585,4315 4621.09,4351.09 v1(4621.09,4438.02)
DIG3: LED3.8 U3.10 | length 580.6
  Bottom Layer w10: U3.10 4336.42,4405 4357.44,4383.98 4357.44,4360.65 4418.09,4300 4695,4300 4735,4340 v1(4735,4425)
DIG4: LED3.6 U3.11 | length 790.6
  Bottom Layer w10: U3.11 4336.42,4355 4416.42,4275 4766.44,4275 4791.44,4300 4841.21,4300 4850,4291.21 4850,4191.67 4825,4166.67 v1(4825,4095)
DP: LED3.3 U3.4 | length 793.1
  Bottom Layer w10: U3.4 4086.91,4231.88 4092.77,4226.02 4118.95,4226.02 4131.26,4213.71 4131.26,4193.74 4245,4080 4375,4080 4380,4075 4381.21,4075 4416.21,4040 4450,4040 4460,4050 4460,4110 4440.5,4129.5 4440.5,4169.14 4446.36,4175 4500,4175 4530,4145 v1(4530,4075)
GND: C1.1 C2.1 C3.1 C4.1 C5.1 C6.1 C7.1 C8.1 C9.1 C10.1 C11.1 GND.1 GND.2 GND.3 GND.4 LED1.1 LED2.1 Q2.2 R1.2 R4.1 R5.2 RESET.2 SW1.1 SW2.1 SW3.1 SW4.2 SW5.1 U2.1 U3.8 U4.2 U4.5 U5.17 USB1.1 USB1.2 USB1.3 USB1.4 USB1.A1 USB1.A12 USB1.B1 USB1.B12 | length 4635.5
  Top Layer w10: v1(2985,4300) 2985,4352.44 C3.1 ; v1(3215,4095) 3240.51,4069.49 C11.1 ; U4.2 3226.83,4388.52 3263.52,4388.52 v1(3265,4390) ; U5.17 3422.57,4404.02 3445,4381.59 3445,4330 v1(3440,4325) ; v1(3505,4240) 3550,4285 v1(3550,4300) ; SW5.1 SW3.1 3931.4,4465 v1(4005,4465) ; SW2.1 SW1.1 ; v1(4005,4125) 4015,4115 4248.34,4115 4267.55,4134.22 4862.45,4134.22 4885,4111.66 v1(4885,4095)
  Bottom Layer w10: USB1.4 2356.06,4089.92 2410,4143.87 R5.2 2379.12,4145 2374.32,4149.8 2360.88,4149.8 R1.2 2351.13,4160.68 2398.44,4207.99 2399.46,4207.99 2410.34,4218.87 R4.1 ; v1(2940,4085) 2950,4095 v1(3215,4095) ; v1(2985,4300) 3010.97,4300 C9.1 ; v1(3265,4390) 3375,4390 v1(3440,4325) 3465,4300 v1(3550,4300) 3599.81,4300 3724.81,4425 3744.83,4425 3757.55,4437.72 3797.33,4437.72 3812.33,4422.72 3821.81,4422.72 3832.56,4411.97 C10.1 C8.1 3897.44,4411.97 3950.47,4465 4051.7,4465 4061.7,4455 U3.8 ; v1(3505,4240) 3558.79,4240 3593.79,4205 C7.1 3782.44,4206.97 3808.19,4232.72 3876.69,4232.72 C5.1@3902.44,4206.97 ; C5.1 C5.1@3902.44,4206.97 ; v1(4005,4125) 4005,4245 3990,4260 v1(3935,4260) 3933.52,4258.52 3933.52,4238.05 C5.1@3902.44,4206.97 ; v1(4885,4095) 5190,4095 5215,4070 5215,3970 5255.86,3929.14 5349.14,3929.14 5430,4010 5430,4154.8 Q2.2
NetC5_2: C5.2 R7.1 SW1.2 | length 99.6
  Bottom Layer w10: v1(3930,4130) 3952.54,4130 R7.1 3957.56,4135.02 C5.2
NetC7_2: C7.2 R8.1 SW2.2 | length 99.6
  Bottom Layer w10: v1(3810,4130) 3832.54,4130 R8.1 3837.56,4135.02 C7.2
NetC8_2: C8.2 R9.1 SW3.2 | length 105.9
  Bottom Layer w10: v1(3930,4330) 3952.54,4330 R9.1 3952.56,4338.13 C8.2
NetC10_2: C10.2 R11.1 SW5.2 | length 173.2
  Bottom Layer w10: C10.2 3745.86,4410 3740,4404.14 3740,4339.94 3745.86,4334.08 R11.1 3781.37,4330 v1(3805,4330)
NetC11_2: C11.2 U5.29 | length 132.7
  Top Layer w10: C11.2 3280.88,4093.1 3306.33,4093.1 U5.29
NetD1_2: D1.2 Q2.3 U1.2 | length 288.5
  Bottom Layer w10: v1(5340,3965) 5340,3970 5387.4,4017.4 Q2.3 5387.4,4230.62 D1.2
NetLED1_2: LED1.2 R2.1
NetLED2_2: LED2.2 R3.1
NetQ1_1: Q1.1 R1.1 | length 99.3
  Bottom Layer w10: R1.1 2350,4271.86 2378.68,4300.53 Q1.1
NetQ2_1: Q2.1 R6.2 | length 79
  Bottom Layer w10: R6.2 5339.14,4142.25 5350,4153.11 Q2.1
NetR4_2: R4.2 USB1.A5 | length 164.5
  Top Layer w10: v1(2445,4265) 2445,4275 2479.21,4309.21 USB1.A5
  Bottom Layer w10: v1(2445,4265) 2446.48,4263.52 2446.48,4244.32 2469.66,4221.13 R4.2
NetR5_1: R5.1 USB1.B5 | length 134.8
  Top Layer w10: v1(2445,4180) 2456.1,4191.1 USB1.B5
  Bottom Layer w10: v1(2445,4180) 2446.48,4178.52 2446.48,4168.98 2469.32,4146.13 R5.1
P00: H2.15 U5.40 | length 704.6
  Top Layer w10: U5.40 3603.69,4111.89 3625.58,4090 3727.57,4090 3752.57,4065 4184.14,4065 4190,4059.14 4190,3970 H2.15
P01: H2.14 U5.39 | length 550.5
  Top Layer w10: U5.39 3589.77,4097.96 3612.73,4075 3721.36,4075 3746.36,4050 4000,4050 H2.14
P02: H2.13 U5.38 | length 458.6
  Top Layer w10: U5.38 3599.73,4060 3715.15,4060 3740.15,4035 3915,4035 H2.13
P03: H2.12 U5.37 | length 366.8
  Top Layer w10: U5.37 3586.88,4045 3705.56,4045 3730.56,4020 3830,4020 H2.12
P04: H2.11 U5.36 | length 361.4
  Top Layer w10: U5.36 3491.63,4083.51 3492.04,4083.51 3545.54,4030 3695,4030 3725,4000 3749.1,4000 3784.1,3965 H2.11
P05: H2.10 U5.35 | length 329.9
  Top Layer w10: U5.35 3436.78,4056.51 3436.78,4048.22 3447.31,4037.69 3516.64,4037.69 3539.33,4015 3635,4015 H2.10
P06: H2.9 U5.34 | length 262.9
  Top Layer w10: U5.34 3450.41,4097.8 3421.78,4069.17 3421.78,4042.01 3443.79,4020 3510,4020 3554.86,3975.14 3574.86,3975.14 H2.9
P07: H2.8 U5.33 | length 196
  Top Layer w10: U5.33 3436.48,4111.72 3406.78,4082.01 3406.78,4035.8 3477.57,3965 H2.8
P10: H2.17 R7.2 U5.43 | length 1397.9
  Top Layer w10: v1(3546.05,4170.41) 3548.14,4170.41 3558.55,4160 3578.91,4160 3604.77,4185.86 3613.05,4185.86 U5.43 3673.91,4125 3735,4125 3765,4095 4245,4095 4255,4085 4255,4020 4261.34,4013.66 v1(4365,4013.66)
  Bottom Layer w10: v1(3546.05,4170.41) 3609.39,4107.07 3856.63,4107.07 3862.49,4112.93 3862.49,4128.22 3868.35,4134.08 R7.2 ; v1(4365,4013.66) 4365,3997.35 4385,3977.35 H2.17
P11: H2.18 R8.2 U5.44 | length 1371.6
  Top Layer w10: v1(3573.56,4198.56) 3573.99,4198.56 3592.09,4216.65 3609.94,4216.65 3659.02,4167.57 U5.44 3659.37,4167.57 3686.93,4140 3760.24,4140 3780.24,4160 4460.99,4160 4467.91,4153.07 v1(4470,4153.07)
  Bottom Layer w10: v1(3573.56,4198.56) 3638.04,4134.08 R8.2 ; v1(4470,4153.07) 4470,4150.99 4485,4135.99 H2.18
P12: H2.19 R9.2 U5.45 | length 1523.6
  Top Layer w10: v1(3630,4255) 3630,4224.59 U5.45 3673.28,4181.48 3699.76,4155 3754.03,4155 3774.03,4175 4565,4175 v1(4575,4165)
  Bottom Layer w10: v1(3630,4255) 3675,4255 3710,4290 3854.35,4290 3897.29,4332.95 R9.2 ; v1@4572.91,4165 v1(4575,4165) 4575,4162.91 4585,4152.91 H2.19
P13: H2.20 R11.2 U5.46 | length 1535.4
  Top Layer w10: v1(3655,4280) 3655,4227.61 3712.61,4170 3747.81,4170 3767.81,4190 4670,4190 v1(4685,4175)
  Bottom Layer w10: v1(3655,4280) 3682.07,4307.07 3808.74,4307.07 3823.74,4322.07 3825.74,4322.07 3836.61,4332.95 R11.2 ; H2.20 v1(4685,4175)
P14: H2.21 U5.47 | length 1327.8
  Top Layer w10: U5.47 3725.27,4185 3741.6,4185 3761.6,4205 4760,4205 v1(4780,4185)
  Bottom Layer w10: v1(4780,4185) 4780,4182.91 4785,4177.91 H2.21
P15: H1.2 R6.1 U5.2 | length 2042.1
  Top Layer w10: U5.2 3724.75,4344.49 3733.04,4344.49 3747.31,4330.22 3747.31,4311.52 3763.82,4295 4000,4295 4045,4250 4765,4250 4785,4270 v1(4785,4360)
  Bottom Layer w10: H1.2 v1(4785,4360) 5004.2,4360 5281.27,4082.93 R6.1
P16: H1.3 U5.3 | length 1312.9
  Top Layer w10: U5.3 3712.44,4360 3755,4360 3761.18,4353.82 3966.18,4353.82 4055,4265 4655,4265 4685,4295 v1(4685,4365)
  Bottom Layer w10: v1(4685,4365) H1.3
P17: H1.4 U5.4 | length 1218.2
  Top Layer w10: U5.4 3699.59,4375 3970,4375 4065,4280 4565,4280 4585,4300 v1(4585,4365)
  Bottom Layer w10: v1(4585,4365) H1.4
P20: H1.17 U5.19 | length 216.8
  Top Layer w10: H1.17 3285,4486.09 U5.19
P21: H1.18 U5.20 | length 272.5
  Top Layer w10: H1.18 3195.39,4547.68 3380.64,4362.43 U5.20
P22: H1.19 U5.21 | length 364.4
  Top Layer w10: H1.19 3094.22,4538.46 3121.54,4538.46 3165,4495 3220.41,4495 U5.21
P23: H1.20 R12.2 U3.7 U4.3 U5.22 | length 1538.3
  Top Layer w10: H1.20 3037.68,4495 3142.84,4495 3215.44,4422.4 U4.3 3265.16,4422.4 U5.22 3391.09,4296.48 3403.52,4296.48 v1(3405,4295) ; R12.2 3238.79,4220 3289.47,4270.68 3350.68,4270.68 3379.55,4299.55 3379.55,4307.84
  Bottom Layer w10: v1(3405,4295) 3425,4275 3570,4275 3608.86,4236.14 3744.76,4236.14 3783.62,4275 3860.56,4275 3885.56,4300 3986.42,4300 4015,4328.58 4015,4356.42 4063.58,4405 U3.7
P24: H1.21 R13.2 U3.6 U4.1 U5.23 | length 1589.7
  Top Layer w10: R13.2 3214.66,4340.79 3222.67,4348.8 3278.8,4348.8 v1(3280,4350) 3309.56,4350 3338.88,4320.68 U5.23
  Bottom Layer w10: H1.21 2929.34,4503.34 3124.99,4503.34 3278.33,4350 v1(3280,4350) 3370,4260 3560,4260 3600,4220 3749.83,4220 3779.83,4250 3860,4250 3895,4285 3992.64,4285 4062.64,4355 U3.6
P25: H2.2 U5.26 | length 555.4
  Top Layer w10: H2.2 2890.18,3970.18 2931.5,3970.18 2996.32,4035 3065,4035 3192.99,4162.99 3292.89,4162.99 3339.06,4209.16 U5.26
P26: H2.3 U5.27 | length 463.4
  Top Layer w10: H2.3 3040,4020 3075,4020 3202.99,4147.99 3305.55,4147.99 U5.27
P27: H2.4 U5.28 | length 395
  Top Layer w10: H2.4 3085.64,3965.64 3085.64,4005.64 3212.99,4132.99 3318.4,4132.99 U5.28
P32: H1.8 SW4.1 U5.9 | length 1326.9
  Top Layer w10: SW4.1 3143.32,4155.75 3180.57,4192.99 3232.99,4192.99 3295.68,4255.68 3450.23,4255.68 3570.04,4375.48 3570.04,4384.63 U5.9 3603.68,4418.11 3629.4,4443.82 3709.82,4443.82 3718.64,4435 4150,4435 4178.46,4463.46 4178.46,4541.14 H1.8
P33: H1.9 U5.10 | length 568.3
  Top Layer w10: U5.10 3647.56,4490 4070,4490 4085,4505 H1.9
P34: H1.10 U5.11 | length 575.7
  Top Layer w10: v1(3551.18,4383.3) 3550,4384.47 3550,4420.1 3575.68,4445.78 U5.11
  Bottom Layer w10: v1(3551.18,4383.3) 3551.71,4383.82 3575.04,4383.82 3631.21,4440 3725,4440 3760,4475 3912.32,4475 H1.10
P35: H1.11 U5.12 | length 573.3
  Top Layer w10: v1(3525,4360) 3525,4423.12 U5.12
  Bottom Layer w10: v1(3525,4360) 3525,4395 3550,4420 3590,4420 3625,4455 3715,4455 3750,4490 3827.32,4490 H1.11
P36: H1.12 U5.13 | length 412.1
  Top Layer w10: U5.13 3505,4433.12 v1(3505,4400)
  Bottom Layer w10: v1(3505,4400) 3575,4470 3707.32,4470 H1.12
P37: H1.13 U5.14 | length 422.8
  Top Layer w10: U5.14 3464.33,4445.77 3485,4425.1 3485,4377.09 3470,4362.09 v1(3470,4360)
  Bottom Layer w10: v1(3470,4360) 3470,4402.4 3557.6,4490 3635,4490 3685,4540 H1.13
P40: H1.16 U5.18 | length 167.2
  Top Layer w10: H1.16 3385,4414.09 3408.65,4390.44 U5.18
P41: H2.6 U5.31 | length 225.9
  Top Layer w10: H2.6 3285,4016.09 U5.31
P42: H2.16 U5.42 | length 750.2
  Top Layer w10: U5.42 3661.08,4110 3728.79,4110 3758.79,4080 4196.24,4080 4230,4046.24 v1(4230,4005)
  Bottom Layer w10: v1(4230,4005) 4231.48,4003.52 4246.48,4003.52 H2.16
P43: H1.6 U5.7 | length 1110.1
  Top Layer w10: U5.7 3631.52,4390.27 3655.07,4413.82 3697.39,4413.82 3706.21,4405 3990,4405 4085,4310 4420,4310 4440,4330 v1(4440,4365)
  Bottom Layer w10: H1.6 4420,4512.68 4420,4385.81 4440,4365.81 v1(4440,4365)
P45: H2.5 U5.30 | length 287.9
  Top Layer w10: H2.5 3195.14,3975.14 3216.23,3975.14 U5.30
P46: H2.7 U5.32 | length 176.4
  Top Layer w10: H2.7 3385,4088.24 U5.32
P50: H1.22 U5.24 | length 651
  Top Layer w10: v1(3303.33,4293.33) 3304.81,4294.81 3313.19,4294.81 U5.24
  Bottom Layer w10: H1.22 2847.68,4485 3111.67,4485 v1(3303.33,4293.33)
P51: H2.1 U5.25 | length 647.1
  Top Layer w10: H2.1 2805.64,3985.64 2825.64,3985.64 2855,4015 2945,4015 2980,4050 3058.79,4050 3186.78,4177.99 3279.87,4177.99 U5.25
P52: H2.22 U5.48 | length 1446.4
  Top Layer w10: U5.48 3731.87,4206.24 3732.28,4206.24 3746.04,4220 4850,4220 4885,4185 4885,4154.09 4920,4119.09 4920,4000 H2.22
P53: H1.1 U5.1 | length 1511.9
  Top Layer w10: U5.1 3719.28,4311.16 3719.69,4311.16 3768.2,4262.64 3768.2,4242.04 3775.24,4235 4850,4235 4890,4275 4890,4542.68 H1.1
P56: H1.14 U5.15 | length 233.6
  Top Layer w10: U5.15 3450.41,4432.2 3430,4452.61 3430,4470 3452.31,4492.31 3529.63,4492.31 H1.14
P57: H1.15 U5.16 | length 171.6
  Top Layer w10: U5.16 3436.49,4418.28 3410,4444.76 3410,4472.68 H1.15
RESET: C9.2 R10.1 RESET.1 U5.5 | length 926.1
  Top Layer w10: RESET.1 3080,4269.39 v1(3080,4215) ; v1(3475,4175) 3515,4175 3630,4290 3630,4333.07 3659.19,4362.26 U5.5
  Bottom Layer w10: R10.1 C9.2 3049.37,4245.63 v1(3080,4215) 3110,4245 3235,4245 3305,4175 v1(3475,4175)
SEG1: LED3.11 U3.12 | length 309.4
  Top Layer w10: v1(4255,4360) 4380,4360 4398.86,4378.86 4398.86,4421.07 LED3.11
  Bottom Layer w10: v1(4255,4360) 4255,4339.76 4289.76,4305 U3.12
SEG2: LED3.7 U3.13 | length 682.4
  Top Layer w10: LED3.7 4820,4432.21 v1(4820,4270)
  Bottom Layer w10: U3.13 4802.91,4255 4817.91,4270 v1(4820,4270)
SEG3: LED3.4 U3.15 | length 437.6
  Bottom Layer w10: U3.15 4368.79,4155 4403.79,4190 4615,4190 4630,4175 v1(4630,4075)
SEG4: LED3.2 U3.16 | length 119.3
  Bottom Layer w10: U3.16 4390,4105 v1(4420,4075)
SEG5: LED3.1 U3.1 | length 266.6
  Bottom Layer w10: U3.1 4086.91,4068.09 4115,4040 v1(4305,4040)
SEG6: LED3.10 U3.2 | length 943.9
  Bottom Layer w10: U3.2 4063.58,4155 4027.56,4191.02 4027.56,4298.71 4058.85,4330 4095,4330 4098.98,4333.98 4118.95,4333.98 4264.97,4480 4369.14,4480 4387.44,4461.7 4387.44,4373.08 4425.52,4335 4490,4335 4515,4360 4515,4430 v1(4520,4435)
SEG7: LED3.5 U3.3 | length 926.8
  Bottom Layer w10: U3.3 4063.58,4205 4042.56,4226.02 4042.56,4263.71 4054.87,4276.02 4163.98,4276.02 4200,4240 4275.03,4240 4289.01,4226.02 4408.98,4226.02 4430,4205 4710,4205 4720,4195 v1(4720,4075)
VBUS: C1.2 L1.1 USB1.A4 USB1.A9 USB1.B4 USB1.B9
VCC: C4.2 C6.2 L2.2 R2.2 R10.2 R12.1 R13.1 U3.14 U4.4 U5.41 | length 2406.7
  Top Layer w10: v1(2855,4443.04) 2935.48,4443.04 C4.2 2937.44,4446.97 2972.07,4481.6 3029.86,4481.6 3062.28,4449.18 3062.28,4428.31 3073.03,4417.56 C6.2 C6.2@3079.84,4422.4 ; v1(3085,4450) 3085,4427.56 C6.2@3079.84,4422.4 ; v1(3115,4285) R13.1 3155.34,4252.99 3151.22,4248.87 3151.22,4230.88 R12.1 3130,4209.66 v1(3130,4180) ; U4.4 C6.2@3079.84,4422.4 ; v1(3520,4130) 3534.33,4144.33 3592.74,4144.33 3594.02,4143.05 3600.19,4143.05 U5.41 ; v1(4035,4135) 4037.09,4135 4042.09,4140 v1(4230,4140)
  Bottom Layer w10: v1(2855,4443.04) 2879.32,4418.72 R2.2 ; R10.2 3012.85,4121.09 3071.76,4180 v1(3130,4180) 3278.79,4180 3328.79,4130 v1(3520,4130) 3565.25,4130 3610.25,4085 3983.79,4085 4004.93,4106.14 4012.81,4106.14 4023.86,4117.19 4023.86,4121.77 4035,4132.91 v1(4035,4135) ; v1(3085,4450) 3085,4315 v1(3115,4285) ; v1(4230,4140) 4230,4142.09 4292.91,4205 U3.14
pads on no net: USB1.A8 USB1.B8

## Polygon pours and split planes (outlines as drawn)
GND on Top Layer "GND_L01_P009" (solid, remove dead copper, pour order 9): 2275,3925 2275,4585 cw(c2295,4585) 2295,4605 5515,4605 cw(c5515,4585) 5535,4585 5535,3925 cw(c5515,3925) 5515,3905 2295,3905 cw(c2295,3925)
GND on Top Layer "GND_L01_P002" (solid, remove dead copper, pour order 2): 2965,4485 3040,4485 3040,4410 3235,4410 3235,4365 3175,4305 2969.36,4305 2969.36,4044.36 2950,4025 2730,4025 2730,3930 2710,3910 2705,3915 2305,3915 2305,4050 2290,4065 2290,4125 2298.36,4133.36 2487.05,4133.36 2487.05,4154.6 2580,4154.6 2580,4100 2775,4100 2860,4185 2860,4305 2910,4305 2930,4325 2955,4325 2965,4335
+5V on Top Layer "+5V_L01_P005" (solid, remove dead copper, pour order 5): 2585,4325 2735,4325 2770,4290 2770,4160 2667.15,4160 2650,4177.15 2650,4250 2605,4250 2580,4275 2580,4320
GND on Top Layer "GND_L01_P003" (solid, remove dead copper, pour order 3): 2275,4475 2675,4475 2675,4405 2655,4385 2575,4385 2560,4370 2390,4370 2375,4355 2375.71,4354.29 2375.71,4065.71 2335,4025 2275,4025
VBUS on Top Layer "VBUS_L01_P000" (solid, remove dead copper, pour order 0): 2560,4370 2560,4340 2420,4340 2420,4160 2475,4160 2475,4180 2560,4180 2585,4205 2585,4230 2600,4245 2655,4245 2655,4100 2580,4100 2580,4140 2570,4150 2485,4150 2475,4140 2395,4140 2395,4370
+3V3 on Top Layer "+3V3_L01_P004" (solid, remove dead copper, pour order 4): 2690,4410 2965,4410 2965,4329.43 2940.57,4305 2690,4305
GND on Bottom Layer "GND_L02_P008" (solid, remove dead copper, pour order 8): 2275,3925 2275,4585 cw(c2295,4585) 2295,4605 5515,4605 cw(c5515,4585) 5535,4585 5535,3925 cw(c5515,3925) 5515,3905 2295,3905 cw(c2295,3925)
+5V on Bottom Layer "+5V_L02_P007" (solid, remove dead copper, pour order 7): 2500,4385 2560,4325 2665,4325 2665,4265 2590,4265 2555,4300 2435,4300 2425,4310 2425,4385
+5V_EXT on Bottom Layer "+5V_EXT_L02_P006" (solid, remove dead copper, pour order 6): 2295,4595 2705,4595 2705,4500 2470,4500 2440,4470 2440,4330 2340,4330 2340,4465 2295,4510

## Keep-outs
Keep-Out Layer:
  the board outline again, w1

## Silkscreen, mask and mechanical layers (free items; w line width, h text height)
Top Overlay:
  drawing of 135 lines, arcs and shapes, not listed
  text "高俊杰-24101080322-电气24-3" at 4960,4564.02 h45